# EAGLE board motorshieldv6_jd (EAGLE 5.06)
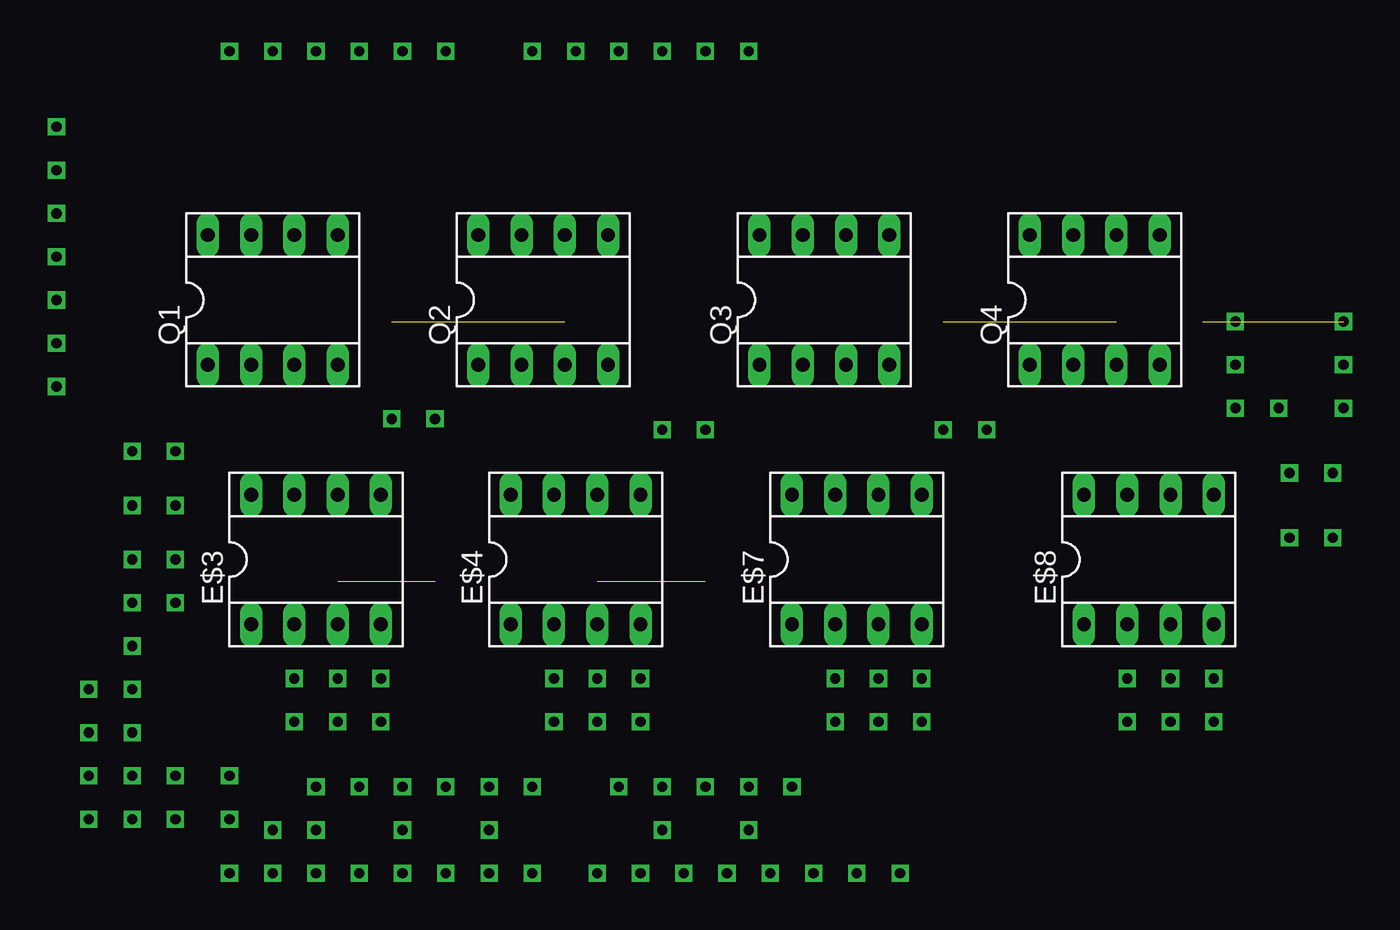
[diagram p0: board, top side]
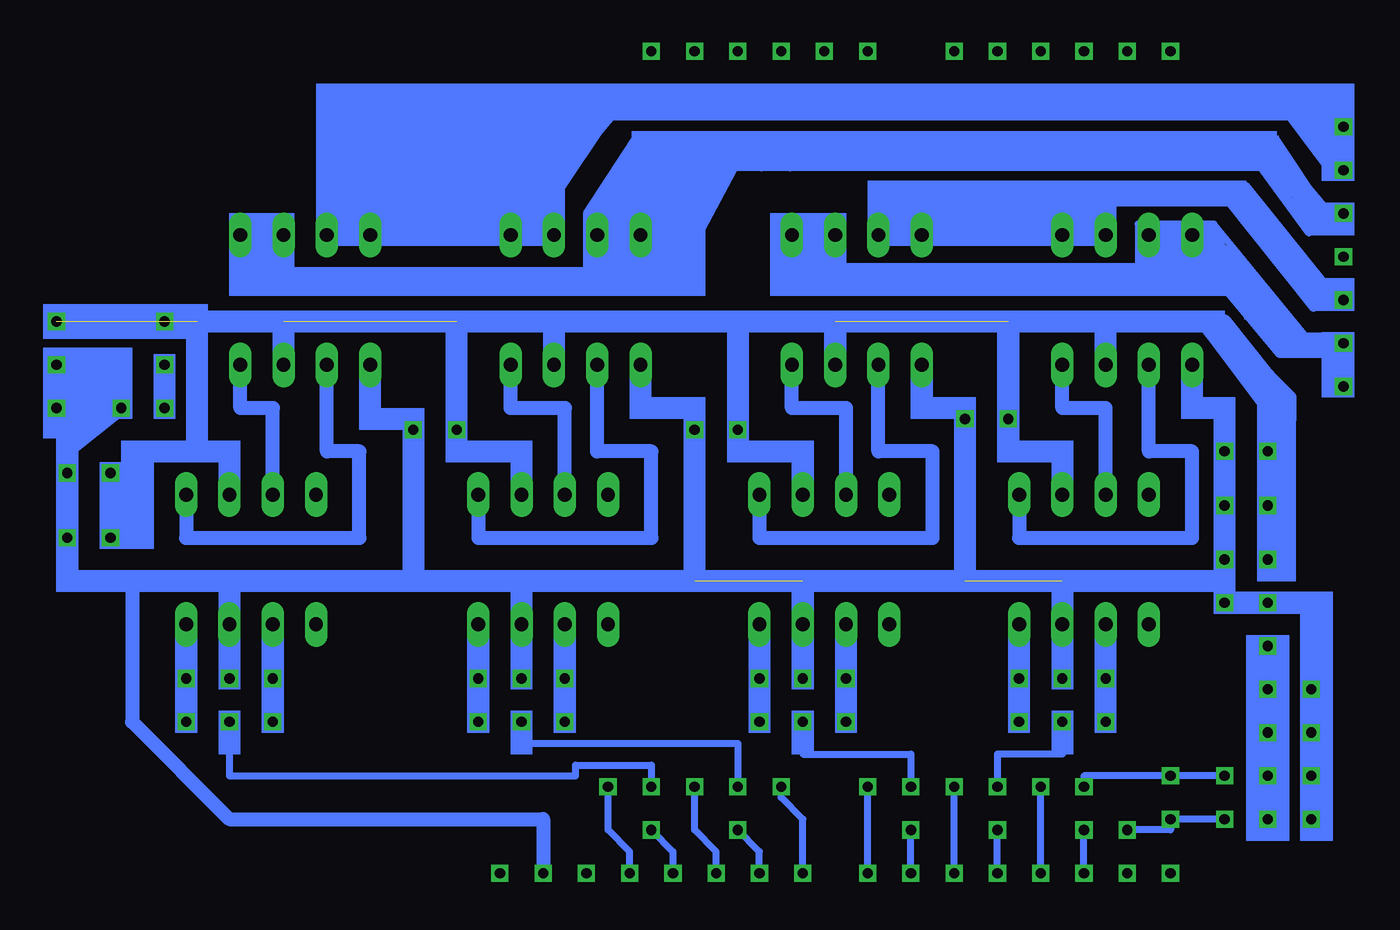
[diagram p1: board, bottom side, seen from below]

No outline drawn. Coordinates in mm, seen from the top.
Copper layers (1*16): Top 0.035mm / dielectric 1.5mm / Bottom 0.035mm
Design rules "default": minimum track width 10mil, minimum drill 24mil, track to track 8mil, track to pad 8mil, pad to pad 8mil, via to via 8mil, smd to smd 8mil, copper to edge 40mil, drill to drill 8mil, minimum pad ring 10mil, minimum via ring 8mil, stop-mask expansion 4mil, vias tented up to drill 0mil, thermal gap 10mil

## Footprints (pad centres in the part's own frame; a part is rotated, then mirrored left to right if it is on the bottom)
SOCKET-08 = drill 0.813 long: 1 -3.81,-3.81; 2 -1.27,-3.81; 3 1.27,-3.81; 4 3.81,-3.81; 5 3.81,3.81; 6 1.27,3.81; 7 -1.27,3.81; 8 -3.81,3.81

## Placement (x,y rotation side)
E$3  TC4427  [SOCKET-08]  15.24,18.41 0 top
E$4  TC4427  [SOCKET-08]  30.48,18.41 0 top
E$7  TC4427  [SOCKET-08]  46.99,18.41 0 top
E$8  TC4427  [SOCKET-08]  64.14,18.41 0 top
Q1  AOP610  [SOCKET-08]  12.7,33.66 0 top
Q2  AOP610  [SOCKET-08]  28.57,33.66 0 top
Q3  AOP610  [SOCKET-08]  45.09,33.66 0 top
Q4  AOP610  [SOCKET-08]  60.96,33.66 0 top

## Library data of the parts
E$3 E$4 E$7 E$8 Q1-Q4 = ic-package

## Nets
GND: E$3.3 E$4.3 E$7.3 E$8.3 Q1.1 Q2.1 Q3.1 Q4.1
S$1: E$3.5 Q1.2
S$3: E$3.7 Q1.4
S$6: E$4.7 Q2.4
S$7: E$4.5 Q2.2
S$11: Q3.7 Q3.8 Q4.5 Q4.6
S$12: Q1.7 Q1.8 Q2.5 Q2.6
S$13: E$3.2
S$15: E$3.4
S$16: Q3.6 Q4.7
S$18: E$7.5 Q3.2
S$22: E$7.7 Q3.4
S$23: E$8.7 Q4.4
S$28: E$8.5 Q4.2
S$29: E$4.2
S$31: E$4.4
S$32: E$7.2
S$34: E$7.4
S$35: E$8.2
S$39: Q1.6 Q2.7
S$41: E$8.4
VCC: E$3.6 E$4.6 E$7.6 E$8.6 Q1.3 Q2.3 Q3.3 Q4.3

## Tracks (layer width: path | path; a pad name or v marks a point on that pad's centre or on a via)
GND  (via drill 0.6)  (2 unrouted)
  Bottom 0.406: 74.3,25.4 74.93,24.77 v74.93,23.5 v74.93,19.68 74.93,17.14 | Q4.1 57.15,27.94 | v65.41,11.43 E$8.3 65.41,17.14 | v48.26,11.43 E$7.3 48.26,17.14 | v31.75,11.43 E$4.3 31.75,17.14 | 22.23,27.3 v22.23,26.67 22.23,17.14 | v16.51,11.43 E$3.3 16.51,17.14 | 6.99,27.3 v6.99,24.77 v6.99,21.59 v6.99,18.41
  Bottom 0.813: v71.75,27.3 74.93,24.77 74.93,17.14 71.12,17.14 | v46.99,0 46.99,3.17 65.41,3.17 71.12,8.89 71.12,17.14 | Q4.1 57.15,26.67 54.61,26.67 54.61,17.14 | 65.41,17.14 71.12,17.14 | 65.41,17.14 v65.41,11.43 | 54.61,17.14 65.41,17.14 | Q3.1 41.27,27.3 38.1,27.3 38.1,17.14 | 48.26,17.14 54.61,17.14 | 48.26,17.14 v48.26,11.43 | 38.1,17.14 48.26,17.14 | Q2.1 24.77,27.3 22.23,27.3 22.23,17.14 | Q1.1 8.89,27.3 6.99,27.3 v6.99,18.41 | 31.75,17.14 38.1,17.14 | 31.75,17.14 v31.75,11.43 | 22.23,17.14 31.75,17.14 | 16.51,17.14 22.23,17.14 | 16.51,17.14 v16.51,11.43 | 16.51,17.14 6.99,17.14 v6.99,18.41 | v6.99,15.88 v4.45,15.88 | v6.99,18.41 v6.99,15.88 | v6.99,15.88 1.91,15.88 v1.91,10.79 v1.91,3.17
S$1
  Bottom 0.813: E$3.5 19.05,19.68 8.89,19.68 8.89,24.77 11.43,24.77 Q1.2
S$2  (via drill 0.6)
  Bottom 0.406: v31.75,0 31.75,3.17 33.02,4.45 v33.02,5.08
S$3
  Bottom 0.813: E$3.7 13.97,27.3 16.51,27.3 Q1.4
S$4  (via drill 0.6)
  Bottom 0.406: v34.29,0 34.29,1.27 v35.56,2.54
S$5  (via drill 0.6)
  Bottom 0.406: v36.83,0 36.83,1.27 38.1,2.54 v38.1,5.08
S$6
  Bottom 0.813: Q2.4 32.38,27.3 29.21,27.3 E$4.7
S$7
  Bottom 0.813: E$4.5 34.29,19.68 24.13,19.68 24.13,24.77 27.3,24.77 Q2.2
S$8  (via drill 0.6)
  Bottom 0.406: v40.64,2.54 39.37,1.27 v39.37,0
S$9  (via drill 0.6)
  Bottom 0.406: v41.91,0 41.91,1.27 43.18,2.54 v43.18,5.08
S$10  (via drill 0.6)
  other vias: 44.45,0
S$11  (via drill 0.6)
  Bottom 0.406: Q4.5 Q4.6 | Q3.7 Q3.8 38.1,37.47
  Bottom 0.813: Q4.6 Q4.5 64.77,34.92 43.81,34.92 Q3.7 38.1,37.47 35.31,42.67 4.57,42.67 1.91,38.73 v0,38.73
S$12  (via drill 0.6)
  Bottom 0.406: Q2.5 Q2.6 | Q1.8 Q1.7 | v0,28.57 v0,31.11 | 1.91,31.11 7.62,38.1 12.06,38.1 12.06,35.56
  Bottom 0.813: v0,28.57 v0,31.11 1.91,31.11 3.17,31.11 6.35,34.92 8.89,34.92 | 8.89,34.92 Q1.8 Q1.7 | 8.89,34.92 32.38,34.92 Q2.5 Q2.6
S$13  (via drill 0.6)
  Bottom 0.406: E$3.2 v13.97,11.43 v13.97,8.89
  Bottom 0.813: E$3.2 v13.97,8.89
S$14  (via drill 0.6)
  Bottom 0.406: v16.51,8.89 16.51,6.99 20.32,6.99 v20.32,5.08
S$15  (via drill 0.6)
  Bottom 0.406: E$3.4 v19.05,11.43 v19.05,8.89
S$16
  Bottom 0.406: 46.35,38.1 46.35,38.73 | Q3.6 Q4.7
  Bottom 0.813: 46.35,40.64 42.55,45.21 | 46.35,40.64 46.35,38.1 | Q4.7 Q3.6 46.35,40.64
S$17  (via drill 0.6)
  other vias: 10.16,3.17
S$18
  Bottom 0.813: E$7.5 50.8,19.68 40.64,19.68 40.64,24.77 43.81,24.77 Q3.2
S$19  (via drill 0.6)
  Bottom 0.406: v10.16,5.71 15.24,5.71 v15.24,5.08
S$20  (via drill 0.6)
  Bottom 0.406: v6.99,5.71 10.16,5.71
S$21  (via drill 0.6)
  other vias: 0,36.2
S$22
  Bottom 0.406: Q3.4 48.9,27.94
  Bottom 0.813: E$7.7 45.72,27.3 48.9,27.3 Q3.4
S$23
  Bottom 0.406: Q4.4 64.77,27.94
  Bottom 0.813: E$8.7 62.87,27.3 64.77,27.3 Q4.4
S$24
  Bottom 0.406: 1.52,39.24 3.94,42.16
S$25  (via drill 0.6)
  Bottom 0.406: v4.45,3.17 v4.45,8.26
  Bottom 0.813: v4.45,13.34 v4.45,10.79 v4.45,3.17
S$26  (via drill 0.6)
  other vias: 40.64,48.26
S$27  (via drill 0.6)
  other vias: 35.56,48.26
S$28
  Bottom 0.813: E$8.5 67.94,19.68 57.78,19.68 57.78,24.77 59.69,24.77 Q4.2
S$29  (via drill 0.6)
  Bottom 0.406: E$4.2 v29.21,11.43 v29.21,8.89
S$30  (via drill 0.6)
  Bottom 0.406: v31.75,8.89 31.75,6.99 25.4,6.99 v25.4,5.08
S$31  (via drill 0.6)
  Bottom 0.406: E$4.4 v34.29,11.43 v34.29,8.89
S$32  (via drill 0.6)
  Bottom 0.406: E$7.2 v45.72,11.43 v45.72,8.89
  Bottom 0.813: v45.72,8.89 E$7.2
S$33  (via drill 0.6)
  Bottom 0.406: v48.26,8.89 48.26,7.62 35.56,7.62 v35.56,5.08
S$34  (via drill 0.6)
  Bottom 0.406: E$7.4 v50.8,11.43 v50.8,8.89
  Bottom 0.813: v50.8,8.89 E$7.4
S$35  (via drill 0.6)
  Bottom 0.406: E$8.2 v62.87,11.43 v62.87,8.89
  Bottom 0.813: v62.87,8.89 E$8.2
S$36  (via drill 0.6)
  Bottom 0.406: v65.41,8.89 65.41,5.71 45.09,5.71 45.09,6.35 40.64,6.35 v40.64,5.08
S$37  (via drill 0.6)
  Bottom 0.406: v69.22,29.84 v69.22,27.3
  Bottom 0.813: v69.22,29.84 v69.22,27.3
S$38  (via drill 0.6)
  other vias: 69.22,32.38
S$39  (via drill 0.6)
  Bottom 0.406: Q1.6 Q2.7 | 13.97,39.37 5.97,39.37
  Bottom 0.813: v0,33.66 1.27,33.66 6.35,40.01 13.97,40.01 13.97,39.37 Q1.6 Q2.7
S$40
  Bottom 0.406: 1.14,39.12 3.81,42.29
S$41  (via drill 0.6)
  Bottom 0.406: E$8.4 v67.94,11.43 v67.94,8.89
  Bottom 0.813: v67.94,8.89 E$8.4
S$42  (via drill 0.6)
  other vias: 38.1,26.04
S$43
  Bottom 0.406: 1.65,37.72 4.95,41.66 5.08,41.66
S$44  (via drill 0.6)
  other vias: 52.07,26.04
S$45  (via drill 0.6)
  other vias: 54.61,26.04
S$46  (via drill 0.6)
  other vias: 4.45,24.77
S$47  (via drill 0.6)
  other vias: 38.1,48.26
S$48  (via drill 0.6)
  Bottom 0.406: v75.56,27.3 v75.56,29.84
  Bottom 0.813: v75.56,29.84 v75.56,27.3
S$49  (via drill 0.6)
  other vias: 33.02,48.26
S$50  (via drill 0.6)
  other vias: 30.48,48.26
S$51  (via drill 0.6)
  other vias: 27.94,48.26
S$52  (via drill 0.6)
  other vias: 22.86,48.26
S$53  (via drill 0.6)
  other vias: 20.32,48.26
S$54  (via drill 0.6)
  other vias: 17.78,48.26
S$55  (via drill 0.6)
  other vias: 15.24,48.26
S$56  (via drill 0.6)
  other vias: 12.7,48.26
S$57  (via drill 0.6)
  other vias: 10.16,48.26
S$58  (via drill 0.6)
  Bottom 0.406: v27.94,0 v27.94,5.08
S$59  (via drill 0.6)
  Bottom 0.406: v22.86,0 v22.86,5.08
S$60  (via drill 0.6)
  Bottom 0.406: v25.4,0 v25.4,2.54
S$61  (via drill 0.6)
  Bottom 0.406: v20.32,0 v20.32,2.54
S$62  (via drill 0.6)
  Bottom 0.406: v17.78,0 v17.78,5.08
S$63  (via drill 0.6)
  Bottom 0.406: v15.24,0 v15.24,2.54
S$64  (via drill 0.6)
  other vias: 12.7,0
S$65  (via drill 0.6)
  other vias: 10.16,0
S$66
  Bottom 0.406: 1.27,34.54 5.71,40.13
S$67
  Bottom 0.406: 5.71,40.39 1.02,34.54 1.02,34.67
S$68
  Bottom 0.406: 6.86,39.5 1.78,33.15 1.78,33.53 6.48,39.37
S$69
  Bottom 0.406: 4.19,41.4 4.7,41.4 | 32.51,41.4 34.16,41.4 | 2.03,37.59 4.83,41.4 | 4.83,41.4 4.83,41.53 4.7,41.4 | 4.7,41.4 4.83,41.4 | 4.83,41.4 32.51,41.4 | 32.51,41.4 37.59,41.4
S$70
  Bottom 0.406: 34.29,42.29 33.53,41.91
S$71  (via drill 0.6)
  Bottom 0.406: v0,41.27 v0,43.81
  Bottom 0.813: v0,41.27 v0,43.81 v0,41.27
S$72
  Bottom 0.406: 1.14,38.86 3.94,43.05 3.17,40.01 4.32,41.27
S$73
  Bottom 0.406: 41.66,43.05 41.66,37.08 41.78,37.08
S$74  (via drill 0.6)
  other vias: 49.53,0
S$75
  Bottom 0.406: 41.27,42.55 41.66,43.05 44.45,38.73 44.45,35.56
S$76
  Bottom 0.406: 41.4,42.93 44.07,38.86
S$77  (via drill 0.6)
  other vias: 1.91,8.26
S$78  (via drill 0.6)
  other vias: 4.45,5.71
S$79
  Bottom 0.406: 46.48,39.62 42.8,44.83
S$80  (via drill 0.6)
  other vias: 1.91,5.71
S$81
  Bottom 0.406: 42.67,45.09 46.74,38.99 46.74,41.66
S$82
  Bottom 0.406: 1.02,41.53 3.3,44.58 3.3,44.83 3.43,44.83 3.3,44.96 3.3,45.09 3.43,44.96
S$83  (via drill 0.6)
  Bottom 0.406: v6.99,3.17 10.16,3.17 10.16,2.54 v12.7,2.54
S$84
  Bottom 0.406: 6.99,34.29 3.81,30.48 1.27,30.48
S$85
  pour Bottom: 4.95,33.66 6.99,37.21 7.75,37.72 8,36.58 5.08,33.66
S$86
  Bottom 0.254: 7.75,37.72 7.62,37.72 | 7.62,37.72 7.62,37.08 | 7.62,37.72 6.86,36.58 6.73,36.58 3.05,30.61 1.02,30.61 3.3,32.51 2.67,31.75 2.67,31.37 0.89,31.37 0.89,31.62 1.02,30.99
S$87
  Bottom 0.254: 1.02,31.62 3.43,31.62
S$88
  Bottom 0.254: 11.68,35.69 31.75,35.69
S$89
  Bottom 0.254: 6.86,34.29 33.53,34.29
S$90
  Bottom 0.813: 6.35,31.11 3.17,27.94 3.17,26.67
VCC  (via drill 0.6)  (3 unrouted)
  Bottom 0.406: v72.39,23.5 v72.39,19.68 | 62.23,32.38 67.31,32.38 | E$3.6 16.51,24.13 | 35.56,24.77 v35.56,26.04 35.56,32.38 | 19.68,24.77 v19.68,26.67 19.68,32.38 | v4.45,18.41 v4.45,21.59
  Bottom 0.813: v72.39,19.68 v72.39,23.5 71.12,23.5 71.12,24.77 67.31,24.77 | E$8.6 65.41,24.77 67.31,24.77 | 67.31,24.77 67.31,32.38 v75.56,32.38 62.23,32.38 | E$7.6 48.26,24.77 52.07,24.77 52.07,32.38 | 62.23,32.38 Q4.3 | 52.07,32.38 62.23,32.38 | E$4.6 31.75,24.77 35.56,24.77 35.56,32.38 | 46.35,32.38 52.07,32.38 | 46.35,32.38 Q3.3 | 35.56,32.38 46.35,32.38 | E$3.6 16.51,24.77 19.68,24.77 19.68,32.38 | 29.84,32.38 35.56,32.38 | 29.84,32.38 Q2.3 | 19.68,32.38 29.84,32.38 | 13.97,32.38 19.68,32.38 | 13.97,32.38 Q1.3 | 7.62,32.38 6.99,32.38 4.45,29.21 4.45,27.3 | 7.62,32.38 8.26,32.38 | 8.26,32.38 13.97,32.38 | 4.45,27.3 v4.45,21.59 v4.45,18.41 | 7.62,32.38 3.81,27.3 | 3.81,26.67 8.26,32.38 | 8.26,32.38 4.45,27.3 | 7.62,32.38 3.17,27.3
(copper drawn outside any net)
  shapes: Bottom area x160